# Altium PCB Sigmux.PcbDoc
Units mil, origin at the board's own origin, x right, y up, seen from the top; angles counter-clockwise.
Board outline 3520 x 2805 mil, 2 copper layers (Top Layer, Bottom Layer); 56 components, 60 nets, 241 pads, 69 vias.
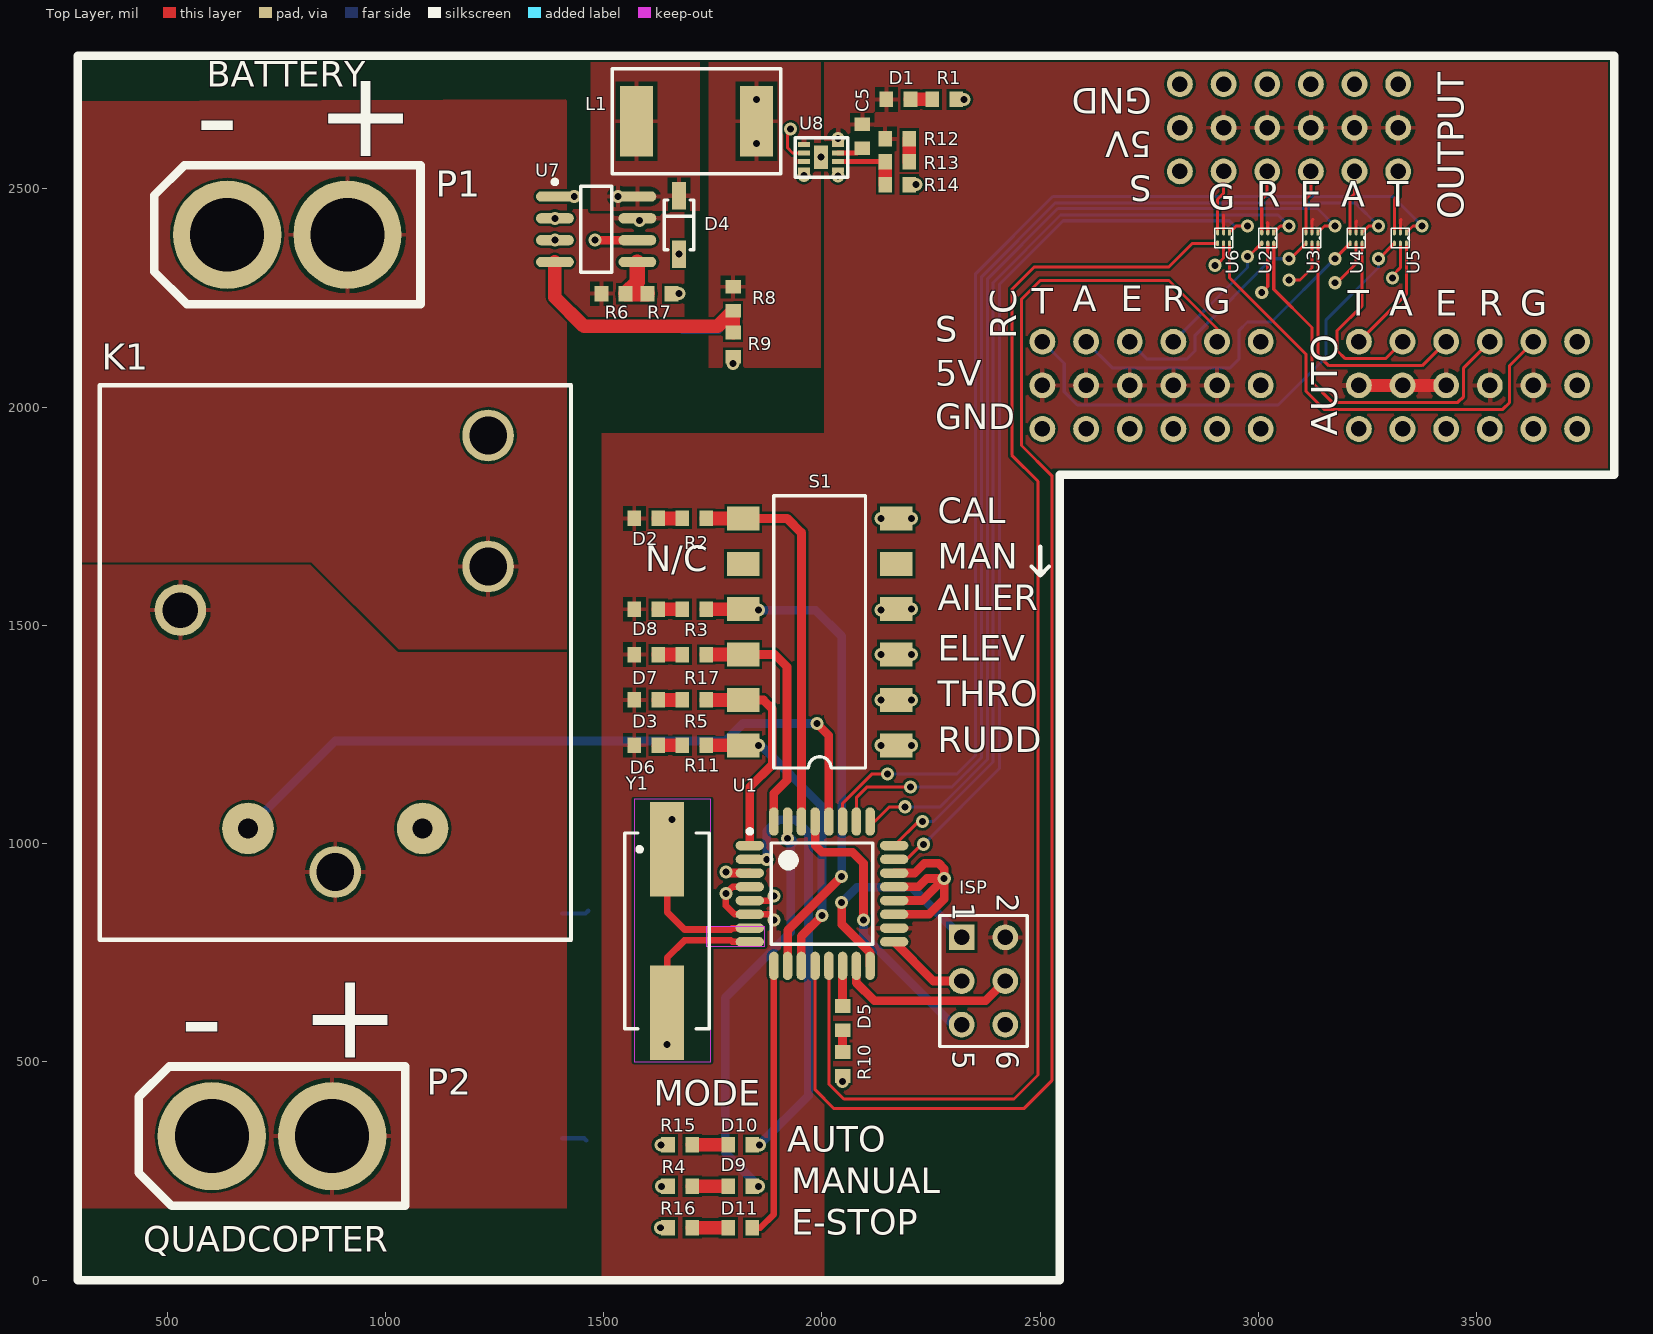
[diagram p0: Top Layer view]
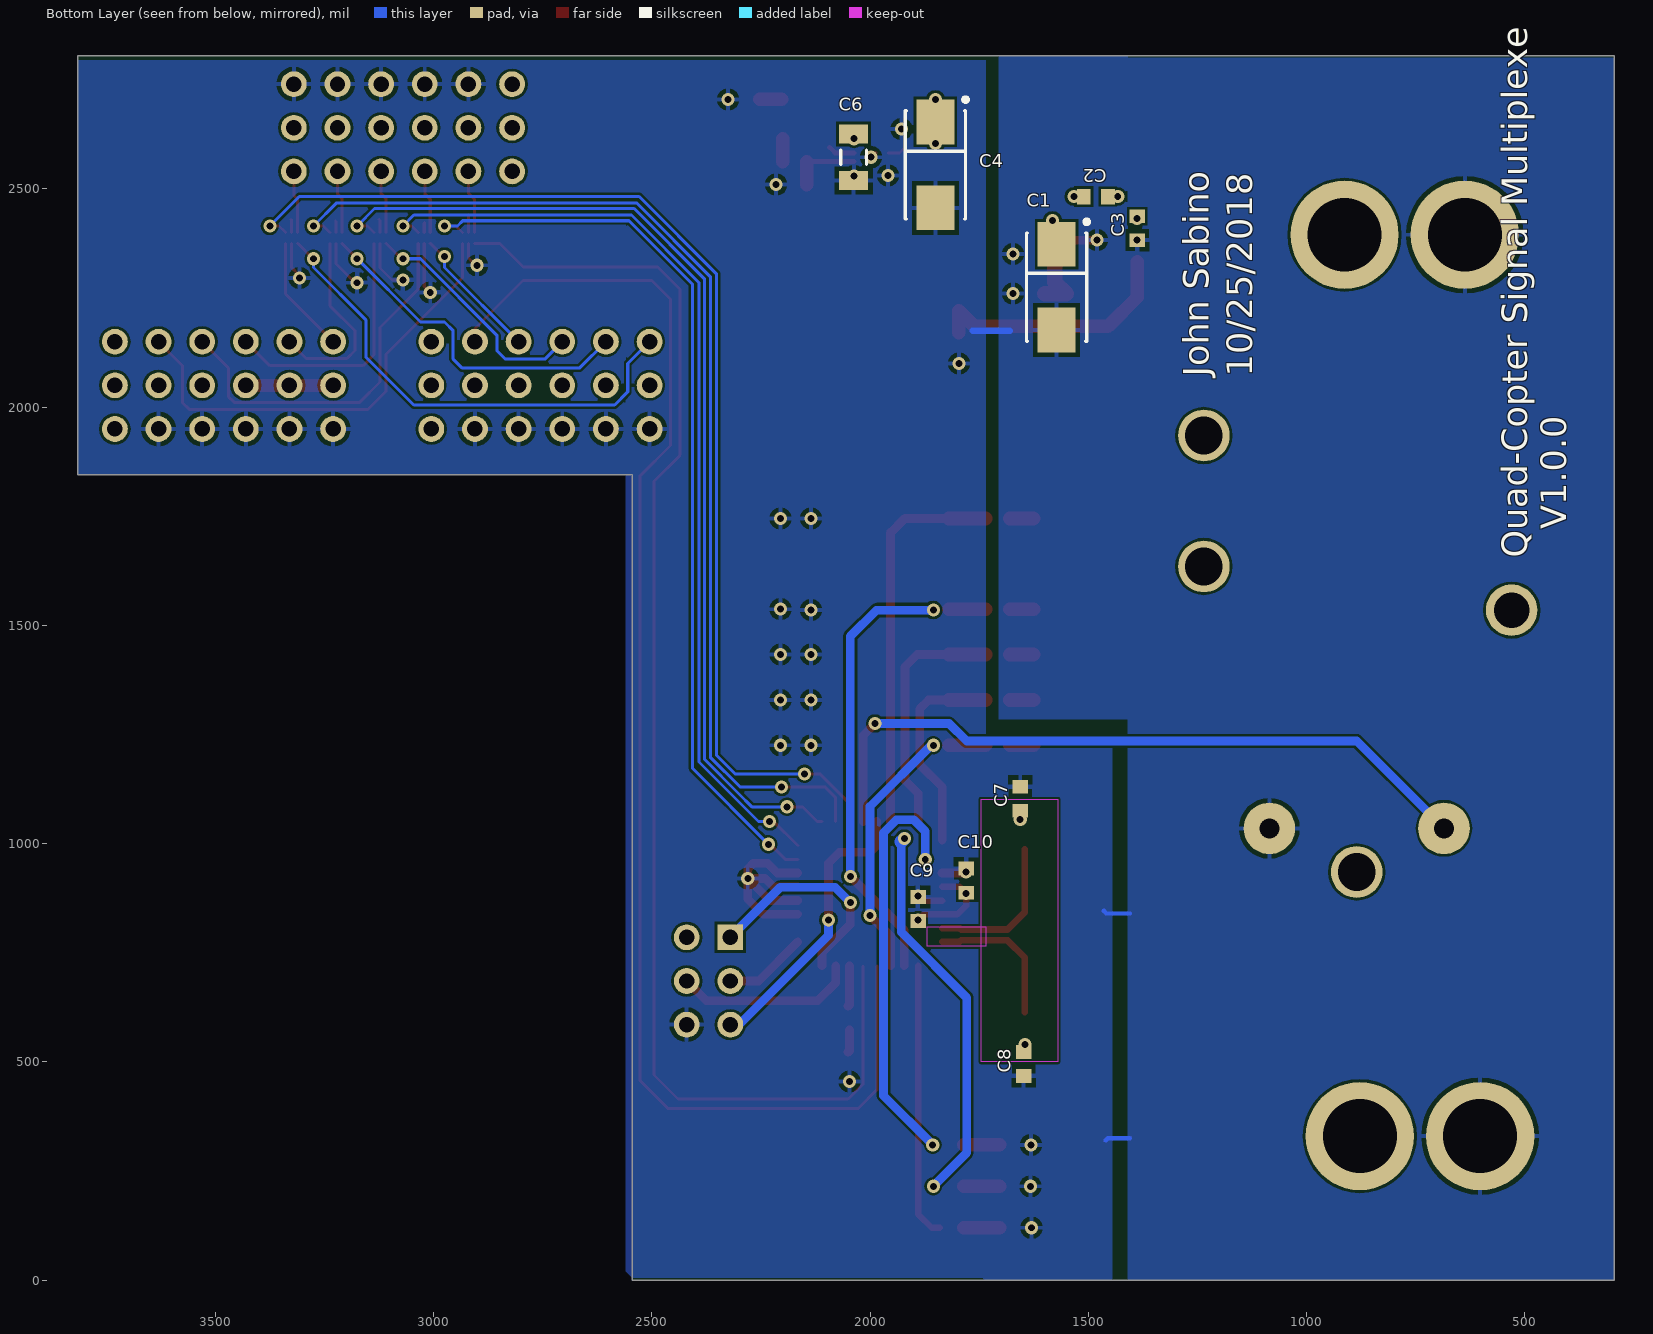
[diagram p1: Bottom Layer view, seen from below]

## Layer stack, top to bottom
Top Solder: solder mask 0.4, Solder Resist, Dk 3.5
Top Layer: signal copper 1.4
Dielectric 1: dielectric 12.6, FR-4, Dk 4.8
Bottom Layer: signal copper 1.4
Bottom Solder: solder mask 0.4, Solder Resist, Dk 3.5

## Board outline
295,0 295,2805 3815,2805 3815,1845 2545,1845 2545,0

## Design rules (kind name [scope] priority, off if disabled: settings)
Clearance Pour_clearance [InPolygon vs ISTrack OR ISVia OR IsPad OR OnLayer('Keep-Out Layer')] p1: gap=6 ignorepadtopadclearanceinfootprint=TRUE except(0: Arc-Hole Track-Hole SMDPad-Hole THPad-Hole Via-Hole Fill-Hole Poly-Hole Region-Hole Text-Hole)
Clearance [All] p2: gap=6 ignorepadtopadclearanceinfootprint=TRUE except(0: Arc-Hole Track-Hole SMDPad-Hole THPad-Hole Via-Hole Fill-Hole Poly-Hole Region-Hole Text-Hole)
DiffPairsRouting [All] p1: maxlimit=5000 minlimit=10 mostfreqgap=10 toplayer_minwidth=15 toplayer_maxwidth=300 toplayer_prefwidth=15 bottomlayer_minwidth=15 bottomlayer_maxwidth=300 bottomlayer_prefwidth=15 maxuncoupledlength=500
MinimumAnnularRing [All] p1: minimumring=6
MinimumSolderMaskSliver [All] p1: minsoldermaskwidth=3
PolygonConnect [All] p1: connectstyle=Relief reliefconductorwidth=10 reliefentries=4 polygonreliefangle="90 Angle" airgapwidth=10
RoomDefinition "Signal Multiplexers" [InComponentClass('Signal Multiplexers')] p1: confinementstyle=ConfineIn formatcopy=TRUE lockcomponents=FALSE outline 3780,1880 3780,2785 2340,2785 2340,1880
RoomDefinition "Power Supplies" [InComponentClass('Power Supplies')] p2: confinementstyle=ConfineIn formatcopy=TRUE lockcomponents=TRUE outline 1317.56,2055 2332.56,2055 2332.56,2800 1317.56,2800
RoomDefinition Microcontroller [InComponentClass('Microcontroller')] p3: confinementstyle=ConfineIn formatcopy=TRUE lockcomponents=FALSE outline 1400,170.32 2500,170.32 2500,1855 1400,1855
RoomDefinition "Emergency Stop System" [InComponentClass('Emergency Stop System')] p4: confinementstyle=ConfineIn formatcopy=TRUE lockcomponents=FALSE outline 270,505 1500,505 1500,1980 270,1980
RoomDefinition "Battery Interface" [InComponentClass('Battery Interface')] p5: confinementstyle=ConfineIn formatcopy=TRUE lockcomponents=FALSE outline 0,0 1460,0 1460,2985 0,2985
RoutingVias VddVias [(InNet('2V5') OR InNet('GND'))] p1 off: holewidth=12 width=24 viastyle="Through Hole" minholewidth=12 minwidth=24 maxholewidth=12 maxwidth=24
RoutingVias [All] p2: holewidth=15 width=30 viastyle="Through Hole" minholewidth=12 minwidth=24 maxholewidth=100 maxwidth=200
RoutingVias BigPowerVias [(InNet('3V8') OR InNet('GND'))] p3 off: holewidth=35 width=47 viastyle="Through Hole" minholewidth=12 minwidth=24 maxholewidth=35 maxwidth=47
SilkToSilkClearance [All] p1: silktosilkclearance=0
SilkToSolderMaskClearance SilkscreenOverComponentPads [All] p1: minsilkscreentomaskgap=0 clearancetoexposedcopper=FALSE
SolderMaskExpansion [All] p1: expansion=3
Width Width_50ohm [InNetClass('RF_Signal')] p1: maxlimit=38.73 minlimit=36.53 preferedwidth=37.62 impedancedriven=TRUE minimp=49.000000 maximp=51.000000 favimp=50.000000
Width Width_power [(InNet('2V5') OR InNet('GND') OR InNet('2V8') OR InNet('NetBUCK_1') OR InNet('NetBUCK_4') OR InNet('3V8') Or InNet('NetBAT_1'))] p2: maxlimit=80 minlimit=6 preferedwidth=20 minimp=50.000000 maximp=50.000000 favimp=50.000000
Width [All] p3: maxlimit=100 minlimit=6 preferedwidth=10 minimp=50.000000 maximp=50.000000 favimp=50.000000
26 further rules are at their usual default settings.

## Classes and differential pairs
net class POWER: LX
component class "Signal Multiplexers": AUTO OUTPUT RC U2 U3 U4 U5 U6
component class "Power Supplies": C1 C2 C3 C4 C5 C6 D1 D4 L1 R1 R6 R7 R8 R9 R12 R13 R14 U7 U8
component class Microcontroller: C7 C8 C9 C10 D2 D3 D5 D6 D7 D8 D9 D10 D11 ISP R2 R3 R4 R5 R10 R11 R15 R16 R17 S1 U1 Y1
component class "Emergency Stop System": K1
component class "Battery Interface": P1 P2
differential pair XTAL: +XTAL_P -XTAL_N

## Components (designator, comment, footprint, x,y, rotation, side; value= is the part's Value field where it differs from the comment)
AUTO "Header 18" PCBComponent_1 3230,2150 r0 top
C1 "T520C" C 1572.56,2275 r270 bottom value="100 uF"
C2 "Cap" 1608[0603] 1482.56,2482.56 r0 bottom value=0.1uF
C3 "Cap" 1608[0603] 1387.56,2410 r270 bottom value=0.1uF
C4 "T520C" C 1850.06,2555 r270 bottom value="100 uF"
C5 "" 1608[0603] 2092.56,2620.56 r90 top value=0.01uF
C6 "Bypass Capacitor" C1206 2037.56,2572.56 r90 bottom value=10uF
C7 "Filter" 1608[0603] 1655.73,1103.06 r270 bottom value=18pF
C8 "Filter" 1608[0603] 1648.02,495 r90 bottom value=18pF
C9 "Bypass Capacitor" 1608[0603] 1890,850.32 r90 bottom value=0.1uF
C10 "Bypass Capacitor" 1608[0603] 1780,915.32 r90 bottom value=0.1uF
D1 "Power LED (RED)" 1608[0603] 2175,2705 r0 top
D2 "Calibration Mode (GREEN)" 1608[0603] 1597.56,1745 r0 top
D3 "Manual Thottle Mode (YELLOW)" 1608[0603] 1597.56,1329.25 r0 top
D4 "D Schottky" SOD123 1672.56,2417.56 r90 top
D5 "uC Status LED (BLUE)" 1608[0603] 2047.24,600.32 r270 top
D6 "Manual Rudder Mode (WHITE)" 1608[0603] 1597.56,1225.32 r0 top
D7 "Manual Elevator Mode (BLUE)" 1608[0603] 1597.56,1433.19 r0 top
D8 "Manual Aileron Mode (RED)" 1608[0603] 1597.56,1537.13 r0 top
D9 "Calibration Mode (GREEN)" 1608[0603] 1812.56,215 r180 top
D10 "Manual Elevator Mode (BLUE)" 1608[0603] 1812.56,310 r180 top
D11 "Manual Aileron Mode (RED)" 1608[0603] 1812.56,120 r180 top
ISP "Header 3X2" HDR2X3 2320,785.32 r270 top
K1 "T90S1D12-5" T90S 882.5,1435 r0 top
L1 "UP1B-101-R" UP1B 1712.56,2655 r0 top value=100uH
OUTPUT "Header 18" PCBComponent_1 3320,2540 r180 top
P1 "To Battery" XT60 775,2395 r0 top
P2 "To Quad-Copter" XT60 740,330 r0 top
R1 "Current Limiting Resistor" 1608[0603] 2280,2705 r180 top value=330
R2 "Current Limiting Resistor" 1608[0603] 1707.56,1745 r180 top value=330
R3 "Current Limiting Resistor" 1608[0603] 1707.56,1537.13 r180 top value=330
R4 "Current Limiting Resistor" 1608[0603] 1675,215 r0 top value=330
R5 "Current Limiting Resistor" 1608[0603] 1707.56,1329.25 r180 top value=330
R6 "Res1" 1608[0603] 1522.56,2260 r180 top value=1M
R7 "Res1" 1608[0603] 1627.56,2260 r180 top value=255K
R8 "" 1608[0603] 1796.2,2248.19 r90 top value=34.8K
R9 "" 1608[0603] 1796.2,2143.19 r90 top value=10K
R10 "Current Limiting Resistor" 1608[0603] 2047.24,495.32 r90 top value=1.18K
R11 "Current Limiting Resistor" 1608[0603] 1707.56,1225.32 r180 top value=330
R12 "Res1" 1608[0603] 2172.56,2615 r180 top value=820K
R13 "Res1" 1608[0603] 2172.56,2562.72 r0 top value=60.4K
R14 "Res1" 1608[0603] 2172.56,2510 r180 top value=120K
R15 "Current Limiting Resistor" 1608[0603] 1675,310 r0 top value=1.18K
R16 "Current Limiting Resistor" 1608[0603] 1675,120 r0 top value=330
R17 "Current Limiting Resistor" 1608[0603] 1707.56,1433.19 r180 top value=1.18K
RC "Header 18" PCBComponent_1 2505,2150 r0 top
S1 "SW DIP-6" A6S-6104-H 2170,1225.32 r180 top
U1 "ATmega8L-8AI" 32A_N 2000,885.32 r0 top
U2 "RUDDER" uDFN-6L 3035.03,2400 r270 top
U3 "ELEVATOR" uDFN-6L 3136.28,2400 r270 top
U4 "AILERON" uDFN-6L 3237.53,2400 r270 top
U5 "THROTTLE" uDFN-6L 3338.78,2400 r270 top
U6 "GEAR" uDFN-6L 2933.78,2400 r270 top
U7 "Switching Regulator" SOIC8_N 1482.56,2407.56 r0 top
U8 "MAX8902BATA+T" "8 TDFN-EP" 1997.56,2572.56 r0 top
Y1 "XTAL 6.5536MHz" HC49/4H_SMX 1645,800 r270 top

## Footprints (in the part's own frame and the unit in brackets; to place one, negate y for a bottom-side part, rotate by r counter-clockwise, add the part's x,y. Pads: shape width x height; smd on the part's side, far side on the other; paste and mask are expansions set on the pad)
"8 TDFN-EP" [mm]
  rect 0.7x0.3 smd: 1(-0.99,0.75) 2(-0.99,0.25) 3(-0.99,-0.25) 4(-0.99,-0.75) 5(0.99,-0.75) 6(0.99,-0.25) 7(0.99,0.25) 8(0.99,0.75)
  rect 0.8x1.38 smd: 9(0,0)
  silkscreen extent -1.5,-1.15 1.55,1.13, body extent -1.08,-1.05 1.06,1.05, height 0.8
32A_N [mm] "Thin QFP, 32-Leads, Body 7x7mm, Pitch 0.8mm, IPC Medium Density"
  oval 1.65x0.55 smd: 1(-4.2,2.8) 2(-4.2,2) 3(-4.2,1.2) 4(-4.2,0.4) 5(-4.2,-0.4) 6(-4.2,-1.2) 7(-4.2,-2) 8(-4.2,-2.8) 17(4.2,-2.8) 18(4.2,-2) 19(4.2,-1.2) 20(4.2,-0.4) 21(4.2,0.4) 22(4.2,1.2) 23(4.2,2) 24(4.2,2.8)
  oval 0.55x1.65 smd: 9(-2.8,-4.2) 10(-2,-4.2) 11(-1.2,-4.2) 12(-0.4,-4.2) 13(0.4,-4.2) 14(1.2,-4.2) 15(2,-4.2) 16(2.8,-4.2) 25(2.8,4.2) 26(2,4.2) 27(1.2,4.2) 28(0.4,4.2) 29(-0.4,4.2) 30(-1.2,4.2) 31(-2,4.2) 32(-2.8,4.2)
  silkscreen extent -4.32,-2.95 2.95,3.75, body extent -3.5,-3.5 3.5,3.5, height 1.2
1608[0603] [mm] "Chip Capacitor, Body 1.6x0.8mm, IPC High Density"
  rect 0.8x0.9 smd: 1(-0.7,0) 2(0.7,0)
  body extent -0.87,-0.48 0.87,0.48, height 1.3
A6S-6104-H [mm]
  rect 1.9x1.4 smd: 1(0,0) 2(0,-2.64) 3(0,-5.28) 4(0,-7.92) 5(0,-10.56) 6(0,-13.2) 7(8.9,-13.2) 8(8.9,-10.56) 9(8.9,-7.92) 10(8.9,-5.28) 11(8.9,-2.64) 12(8.9,0)
  silkscreen extent 1.78,-14.52 7.12,1.32
C [mm] "Capacitor, SM Tantalum; Body 6.0 x 3.2 mm (LxW typ)"
  rect 2.6x2.2 smd: 1(-2.5,0) 2(2.5,0)
  silkscreen extent -3.92,-1.75 3.15,1.87
C1206 [mm] "Chip Capacitor, Body 3.2x1.6mm, IPC High Density"
  rect 1.1x1.7 smd: 1(-1.35,0) 2(1.35,0)
  silkscreen extent -0.4,-0.75 0.4,0.75, body extent -1.7,-0.9 1.7,0.9, height 1.3
HC49/4H_SMX [mm] "Surface Mount Quartz Crystal; Body 13.4 (inc. leads) x 4.9 mm (LxW max)"
  rect 5.5x2 smd: 1(-4.75,0) 2(4.75,0)
  silkscreen extent -5.7,-2.45 5.7,2.45
HDR2X3 [mm] "Connector; Header; 3x2 Position"
  rect 1.5x1.5 hole 0.9: 1(0,0)
  round 1.5 hole 0.9: 2(0,2.54) 3(2.54,0) 4(2.54,2.54) 5(5.08,0) 6(5.08,2.54)
  silkscreen extent -1.27,-1.27 6.35,3.81
PCBComponent_1 [mm]
  round 1.5 hole 0.9: 1(0,0) 2(2.54,0) 3(5.08,0) 4(7.62,0) 5(10.16,0) 6(12.7,0) 7(0,-2.54) 8(2.54,-2.54) 9(5.08,-2.54) 10(7.62,-2.54) 11(10.16,-2.54) 12(12.7,-2.54) 13(0,-5.08) 14(2.54,-5.08) 15(5.08,-5.08) 16(7.62,-5.08) 17(10.16,-5.08) 18(12.7,-5.08)
SOD123 [mm] "SOD-123; 2 Leads; Body 2.7 x 1.6 mm, (LxW)"
  rect 1.6x0.8 smd: 1(-1.7,0) 2(1.7,0)
  silkscreen extent -1.45,-0.85 1.45,0.85
SOIC8_N [mm] "SOIC, 8-Leads, Body 4.9x3.9mm, Pitch 1.27mm, IPC Medium Density"
  oval 2.2x0.6 smd: 1(-2.4,1.905) 2(-2.4,0.635) 3(-2.4,-0.635) 4(-2.4,-1.905) 5(2.4,-1.905) 6(2.4,-0.635) 7(2.4,0.635) 8(2.4,1.905)
  silkscreen extent -2.52,-2.5 0.9,2.88, body extent -2,-2.5 2,2.5, height 1.75
T90S [mm]
  round 3 hole 1.17: 1(-5.016,-10.16) 2(5.143,-10.16)
  round 3 hole 2.19: 3(8.954,5.08) 5(0.064,-12.7) 6(8.954,12.7)
  round 3 hole 2.06: 4(-8.954,2.54)
  silkscreen extent -13.65,-16.64 13.78,15.62
uDFN-6L [mm] "1 mm x 1 mm x 0.35 mm package"
  rect 0.33x0.18 smd: 1(0,0)
  oval 0.33x0.18 smd: 2(0,-0.35) 3(0,-0.7) 4(0.63,-0.7) 5(0.63,-0.35) 6(0.63,0)
  silkscreen extent -0.25,-0.87 0.88,0.17
UP1B [mm]
  rect 1.9x4.1 smd: 1(-3.492,0) 2(3.492,0)
  silkscreen extent -4.89,-3.05 4.89,3.05, body extent -4.44,-3.15 4.45,2.95, height 5.01
XT60 [mm] "LiPO Battery Connector"
  round 6.3 hole 4.3: 1(3.5,0) 2(-3.5,0)
  silkscreen extent -7.75,-4.05 7.75,4.05

## Part data
AUTO OUTPUT RC: "Header, 18-Pin", Manufacturer=Preci-Dip, Manufacturer Part Number=894-80-030-20-001101, Supplier Part Number 1=437-8948003020001101, ComponentLink1Description=https://datasheet.ciiva.com/18657/catalog-18657350.pdf, ComponentLink1URL=https://datasheet.ciiva.com/18657/catalog-18657350.pdf, Contact Plating=Tin, LatestRevisionDate=17-Jul-2002, LatestRevisionNote="Re-released for DXP Platform.", Mount="Through Hole", Number of Rows=3, Pitch=0.1inch, Publisher="Altium Limited", Row Spacing=0.1inch, Supplier 1=Mouser
C1 C4: library part T520D, "Tantalum Capacitors - Polymer SMD 6.3volts 100uF 20% ESR=5mOhms", Case Code - in=2312, Case Code - mm=6032, Manufacturer=KEMET, Manufacturer Part Number=T520C107M006ANE005, Mfr Case Code="C Case", Minimum Operating Temperature="- 55 C", Package / Case="2312 (6032 metric)", Supplier Part Number 1=80-T520C107M6ANE5, Tolerance="20 %", Voltage Rating="6.3 VDC", ComponentLink1Description=http://www.mouser.com/ds/2/212/KEM_T2076_T52X-530-1104134.pdf, ComponentLink1URL=http://www.mouser.com/ds/2/212/KEM_T2076_T52X-530-1104134.pdf, ESR="5 mOhms", Height="2.5 mm", Length="6 mm", Pricing="1=2.05, 10=1.63, 100=1.18, 500=0.800, 1000=0.699, 2500=0.650, 10000=0.625 (USD)", Series=T520, Supplier 1=Mouser, Width="3.2 mm"
C2 C3: "Multilayer Ceramic Capacitors MLCC - SMD/SMT 0603 .1uF 50volts X7R 10%", Case/Package=0603, Dielectric=X7R, Manufacturer="Vishay Semiconductors", Manufacturer Part Number=VJ0603Y104KXAAC, Max Operating Temperature=150°C, Min Operating Temperature=-55°C, Supplier Part Number 1=77-VJ0603Y104KXAAC, Tolerance=10%, Voltage Rating (DC)=50V, ComponentLink1Description=Datasheet, ComponentLink1URL=https://www.mouser.com/datasheet/2/427/vjcommercialseries-222796.pdf, Depth=0.8mm, Lead Free="Lead Free", Length=1.6mm, Supplier 1=Mouser
C5: library part Cap, "Multilayer Ceramic Capacitors MLCC - SMD/SMT 50volts 10000pF X7R 5%", Case Code (Imperial)=0603, Dielectric=X7R, Dielectric Material=Ceramic, Manufacturer=KEMET, Manufacturer Part Number=C0603C103J5RALTU, Max Operating Temperature=125°C, Min Operating Temperature=-55°C, Supplier Part Number 1=80-C0603C103J5RAL, Tolerance=5%, Voltage Rating=50V, ComponentLink1Description=Datasheet, ComponentLink1URL=http://www.kemet.com/docfinder?Partnumber=C0603C103J5RACTU, Depth=0.8mm, Dissipation Factor=2.5%, Height=0.8mm, Lead Pitch=0.7mm, Length=1.6mm, Supplier 1=Mouser, Thickness=0.034inch, Width=0.8mm
C6: library part Cap, "Multilayer Ceramic Capacitors MLCC - SMD/SMT SOFT 1206 25V 10uF X7R 20% T: 1.6mm", Case Code (Imperial)=1206, Dielectric=X7R, Manufacturer=TDK, Manufacturer Part Number=C3216X7R1E106M160AE, Max Operating Temperature=125°C, Min Operating Temperature=-55°C, Supplier Part Number 1=810-C3216X7R1E106MST, Tolerance=20%, Voltage Rating=25V, ComponentLink1Description=https://datasheet.ciiva.com/6285/mlcc-commercial-soft-en-6285640.pdf, ComponentLink1URL=https://datasheet.ciiva.com/6285/mlcc-commercial-soft-en-6285640.pdf, ComponentLink2Description=https://datasheet.ciiva.com/24218/c3216x7r1e106m160ae-265316-24218060.pdf, ComponentLink2URL=https://datasheet.ciiva.com/24218/c3216x7r1e106m160ae-265316-24218060.pdf, ComponentLink3Description=https://datasheet.ciiva.com/6285/mlcc-commercial-soft-en-6285643.pdf, ComponentLink3URL=https://datasheet.ciiva.com/6285/mlcc-commercial-soft-en-6285643.pdf, Composition=Ceramic, Depth=1.6mm, Height=1.8mm, Lead Free="Lead Free", Length=3.2mm, Supplier 1=Mouser, Thickness=0.071inch, Weight=0.000571oz, Width=0.063inch
C7 C8: library part Cap, "Capacitor", Case/Package=0603, Manufacturer=KEMET, Manufacturer Part Number=CBR06C180FAGAC, Max Operating Temperature=125°C, Min Operating Temperature=-55°C, Supplier Part Number 1=80-CBR06C180FAGAC, Tolerance=1%, Voltage Rating=250V, ComponentLink1Description=https://datasheet.ciiva.com/6258/kem-c1030-cbr-smd-6258345.pdf, ComponentLink1URL=https://datasheet.ciiva.com/6258/kem-c1030-cbr-smd-6258345.pdf, ComponentLink2Description=https://datasheet.ciiva.com/6258/kem-c1030-cbr-smd-6258342.pdf, ComponentLink2URL=https://datasheet.ciiva.com/6258/kem-c1030-cbr-smd-6258342.pdf, LatestRevisionDate=17-Jul-2002, LatestRevisionNote="Re-released for DXP Platform.", Length=0.063inch, PackageDescription="Radial Cap, Thru-Hole; 2 Leads; 0.3 in Pin Spacing", PackageReference=RAD-0.3, Published=8-Jun-2000, Publisher="Altium Limited", Supplier 1=Mouser, Thickness=0.034inch, Width=0.031inch
C9 C10: library part Cap, "Multilayer Ceramic Capacitors MLCC - SMD/SMT 0603 .1uF 50volts X7R 10%", Case/Package=0603, Dielectric=X7R, Manufacturer="Vishay Semiconductors", Manufacturer Part Number=VJ0603Y104KXAAC, Max Operating Temperature=150°C, Min Operating Temperature=-55°C, Supplier Part Number 1=77-VJ0603Y104KXAAC, Tolerance=10%, Voltage Rating (DC)=50V, ComponentLink1Description=Datasheet, ComponentLink1URL=https://www.mouser.com/datasheet/2/427/vjcommercialseries-222796.pdf, Depth=0.8mm, Lead Free="Lead Free", Length=1.6mm, Supplier 1=Mouser
D1 D8 D11: library part LED0, "Standard LEDs - SMD Super Red, 660nm 1.7V, 45mcd", Case Code (Imperial)=0603, Case Code (Metric)=1608, Colour=Red, Forward Current=20mA, Forward Voltage=1.7V, Lens Colour=White, Manufacturer=Lumex, Manufacturer Part Number=SML-LX0603SRW-TR, Max Operating Temperature=85°C, Min Operating Temperature=-25°C, Power Rating=50mW, Supplier Part Number 1=696-SML-LX0603SRW, ComponentLink1Description=https://datasheet.ciiva.com/2110/sml-lx0603srw-tr-2110094.pdf, ComponentLink1URL=https://datasheet.ciiva.com/2110/sml-lx0603srw-tr-2110094.pdf, ComponentLink2Description=https://datasheet.ciiva.com/7639/269316-7639176.pdf, ComponentLink2URL=https://datasheet.ciiva.com/7639/269316-7639176.pdf, ComponentLink3Description=https://datasheet.ciiva.com/16200/sml-lx0603srw-tr-16200056.pdf, ComponentLink3URL=https://datasheet.ciiva.com/16200/sml-lx0603srw-tr-16200056.pdf, ComponentLink4Description=https://datasheet.ciiva.com/2110/sml-lx0603srw-tr-2110093.pdf, ComponentLink4URL=https://datasheet.ciiva.com/2110/sml-lx0603srw-tr-2110093.pdf, ComponentLink5Description=https://datasheet.ciiva.com/7639/269316-7639175.pdf, ComponentLink5URL=https://datasheet.ciiva.com/7639/269316-7639175.pdf, ComponentLink6Description=https://datasheet.ciiva.com/2110/sml-lx0603srw-tr-2110095.pdf, ComponentLink6URL=https://datasheet.ciiva.com/2110/sml-lx0603srw-tr-2110095.pdf, ComponentLink7Description=https://datasheet.ciiva.com/30115/sml-lx0603srw-tr-30115864.pdf, ComponentLink7URL=https://datasheet.ciiva.com/30115/sml-lx0603srw-tr-30115864.pdf, ComponentLink8Description=https://datasheet.ciiva.com/15967/sml-lx0603srw-tr-15967174.pdf, ComponentLink8URL=https://datasheet.ciiva.com/15967/sml-lx0603srw-tr-15967174.pdf, ComponentLink9Description=https://datasheet.ciiva.com/4689/sml-lx0603srw-tr-113242-4689205.pdf, ComponentLink9URL=https://datasheet.ciiva.com/4689/sml-lx0603srw-tr-113242-4689205.pdf, Height=0.6mm, Illumination Colour=Red, Lead Free="Lead Free", Length=1.6mm, Lens Style=Diffused,Colorless,Rectangular, Lens Transparency=Diffused, Luminous Intensity=45mcd, Supplier 1=Mouser, Test Current=20mA, Viewing Angle=140°, Wavelength=660nm, Width=0.8mm
D2 D9: library part LED0, "Standard LEDs - SMD Ultra Green, 574nm 2.2V, 45mcd", Case/Package=0603, Colour=Green, Forward Current=20mA, Forward Voltage=2.2V, Lens Colour=White, Manufacturer=Lumex, Manufacturer Part Number=SML-LX0603SUGW-TR, Max Operating Temperature=85°C, Min Operating Temperature=-25°C, Supplier Part Number 1=696-SML-LX0603SUGW, ComponentLink1Description=https://datasheet.ciiva.com/7639/671274-7639178.pdf, ComponentLink1URL=https://datasheet.ciiva.com/7639/671274-7639178.pdf, ComponentLink2Description=https://datasheet.ciiva.com/2111/sml-lx0603sugw-tr-2111273.pdf, ComponentLink2URL=https://datasheet.ciiva.com/2111/sml-lx0603sugw-tr-2111273.pdf, ComponentLink3Description=https://datasheet.ciiva.com/7639/671274-7639177.pdf, ComponentLink3URL=https://datasheet.ciiva.com/7639/671274-7639177.pdf, ComponentLink4Description=https://datasheet.ciiva.com/46391/671274-46391015.pdf, ComponentLink4URL=https://datasheet.ciiva.com/46391/671274-46391015.pdf, ComponentLink5Description=https://datasheet.ciiva.com/2111/sml-lx0603sugw-tr-2111272.pdf, ComponentLink5URL=https://datasheet.ciiva.com/2111/sml-lx0603sugw-tr-2111272.pdf, ComponentLink6Description=https://datasheet.ciiva.com/2111/sml-lx0603sugw-tr-2111271.pdf, ComponentLink6URL=https://datasheet.ciiva.com/2111/sml-lx0603sugw-tr-2111271.pdf, ComponentLink7Description=https://datasheet.ciiva.com/4688/sml-lx0603sugw-tr-113249-4688850.pdf, ComponentLink7URL=https://datasheet.ciiva.com/4688/sml-lx0603sugw-tr-113249-4688850.pdf, ComponentLink8Description=https://datasheet.ciiva.com/16215/sml-lx0603sugw-tr-16215364.pdf, ComponentLink8URL=https://datasheet.ciiva.com/16215/sml-lx0603sugw-tr-16215364.pdf, ComponentLink9Description=https://datasheet.ciiva.com/30110/sml-lx0603sugw-tr-30110777.pdf, ComponentLink9URL=https://datasheet.ciiva.com/30110/sml-lx0603sugw-tr-30110777.pdf, Dominant Wavelength=574nm, Height=0.6mm, Lead Free="Lead Free", Length=1.6mm, Luminous Intensity=45mcd, Supplier 1=Mouser, Test Current=20mA, Viewing Angle=140°, Wavelength=574nm, Width=0.8mm
D3: library part LED0, "Standard LEDs - SMD Yellow 589nm 22mcd 5mA", Case/Package=0603, Colour=Yellow, Forward Current=30mA, Forward Voltage=2.3V, Lens Colour=Clear,Colorless, Manufacturer="Vishay Lite-On", Manufacturer Part Number=LTST-C193KSKT-5A, Max Operating Temperature=85°C, Min Operating Temperature=-55°C, Power Dissipation=75mW, Reverse Voltage=5V, Supplier Part Number 1=859-LTSTC193KSKT5A, Test Current=5mA, ComponentLink1Description=https://datasheet.ciiva.com/2110/s-110-ltst-c193kskt-5a-2110276.pdf, ComponentLink1URL=https://datasheet.ciiva.com/2110/s-110-ltst-c193kskt-5a-2110276.pdf, ComponentLink2Description=https://datasheet.ciiva.com/2110/s-110-ltst-c193kskt-5a-2110277.pdf, ComponentLink2URL=https://datasheet.ciiva.com/2110/s-110-ltst-c193kskt-5a-2110277.pdf, ComponentLink3Description=https://datasheet.ciiva.com/2110/s-110-ltst-c193kskt-5a-2110278.pdf, ComponentLink3URL=https://datasheet.ciiva.com/2110/s-110-ltst-c193kskt-5a-2110278.pdf, ComponentLink4Description=https://datasheet.ciiva.com/26890/getdatasheetpartid-683868-26890500.pdf, ComponentLink4URL=https://datasheet.ciiva.com/26890/getdatasheetpartid-683868-26890500.pdf, ComponentLink5Description=https://datasheet.ciiva.com/4688/lite-on-ltst-c193kskt-5a-187434-4688750.pdf, ComponentLink5URL=https://datasheet.ciiva.com/4688/lite-on-ltst-c193kskt-5a-187434-4688750.pdf, ComponentLink6Description=https://datasheet.ciiva.com/11775/0900766b80dc0553-11775611.pdf, ComponentLink6URL=https://datasheet.ciiva.com/11775/0900766b80dc0553-11775611.pdf, Depth=0.8mm, Dominant Wavelength=594.5nm, Height=0.35mm, Lead Free="Lead Free", Length=1.6mm, Lens Style=Diffused,Colorless,Rectangular, Lens Transparency=Clear, Luminous Intensity=45mcd, Supplier 1=Mouser, Viewing Angle=130°, Width=0.8mm
D4: "Schottky Diodes & Rectifiers Schottky Power Rect .5a", If - Forward Current="0.5 A", Ifsm - Forward Surge Current="5.5 A", Ir - Reverse Current="250 uA", Manufacturer="ON Semiconductor / Fairchild", Manufacturer Part Number=MBR0520L, Operating Temperature Range="- 65 C to + 125 C", Package / Case=SOD-123, Supplier Part Number 1=512-MBR0520L, Vf - Forward Voltage="0.385 V", Vrrm - Repetitive Reverse Voltage="20 V", Code_JEDEC=DO-214-AA, Datasheet=http://www.mouser.com/ds/2/308/MBR0520L-1124987.pdf, Height="1.17 mm (Max)", LatestRevisionDate=17-Jul-2002, LatestRevisionNote="Re-released for DXP Platform.", Length="2.85 mm (Max)", Supplier 1=Mouser, Supplier 2=Digi-Key, Supplier Part Number 2=MBR0520LCT-ND, Technology=Si, Type="Schottky Diode", Width="1.8 mm (Max)"
D5 D7 D10: library part LED0, "Standard LEDs - SMD 0603 Dome Lens LED Blue- 470nm", If - Forward Current=2mA, Manufacturer=Kingbright, Manufacturer Part Number=APHD1608LVBC/D, Maximum Operating Temperature=+85C, Minimum Operating Temperature=-40C, Supplier Part Number 1=604-APHD1608LVBCD, Vf - Forward Voltage=2.65V, ComponentLink1Description=Datasheet, ComponentLink1URL=https://www.mouser.com/datasheet/2/216/APHD1608LVBC-D-1100823.pdf, Luminous Intensity="45 mcd", Supplier 1=Mouser
D6: library part LED0, "Standard LEDs - SMD CHIPLED, WHITE", Colour=White, Forward Current=15mA, Forward Voltage=3.2V, Manufacturer="Osram Opto", Manufacturer Part Number=Q65110-A7209, Max Operating Temperature=85°C, Min Operating Temperature=-40°C, Reverse Voltage=5V, Supplier Part Number 1=720-LWQ38GQ1S13K6L1, Test Current=5mA, ComponentLink1Description=https://datasheet.ciiva.com/26937/getdatasheetpartid-780965-26937253.pdf, ComponentLink1URL=https://datasheet.ciiva.com/26937/getdatasheetpartid-780965-26937253.pdf, Depth=0.9mm, Length=1.7mm, Lens Style=Diffused,Colored,Rectangular, Luminous Flux=0.6lm, Luminous Intensity=224mcd, Supplier 1=Mouser
ISP: "Header, 3-Pin, Dual row", LatestRevisionDate=17-Jul-2002, LatestRevisionNote="Re-released for DXP Platform.", Publisher="Altium Limited"
K1: "General Purpose Relays SPST-NO PCB 5 VDC", Coil Current=185mA, Coil Power=1W, Coil Resistance=27R, Coil Voltage (DC)=5V, Contact Current Rating=30A, Contact Voltage Rating (AC)=277V, Manufacturer="TE Connectivity", Max Operating Temperature=85°C, Min Operating Temperature=-55°C, Power Consumption=2.8W, Supplier Part Number 1=655-T90S1D12-5, Voltage Rating (AC)=240V, Coil Type=Non-Latching, ComponentLink1Description=https://datasheet.ciiva.com/2406/eng-ds-1308242-t90-0214-t90-2406880.pdf, ComponentLink1URL=https://datasheet.ciiva.com/2406/eng-ds-1308242-t90-0214-t90-2406880.pdf, ComponentLink2Description=https://datasheet.ciiva.com/30468/0900766b8107bb2d-30468875.pdf, ComponentLink2URL=https://datasheet.ciiva.com/30468/0900766b8107bb2d-30468875.pdf, ComponentLink3Description=https://datasheet.ciiva.com/7999/1470339-7999710.pdf, ComponentLink3URL=https://datasheet.ciiva.com/7999/1470339-7999710.pdf, Contact Material=Silver,Cadmium, Current Rating=30A, Depth=25.9mm, Height=20.4mm, Length=32.3mm, Manufacturer Part Number=T90S1D12-5, Max Voltage Rating (AC)=277V, Mount="Through Hole,PCB", Number of Pins=5, Operate Time=15ms, Release Time=15ms, Supplier 1=Mouser, Throw Configuration=SPST, Voltage Rating (DC)=5V, Weight=0.918oz, Width=27.4mm
L1: library part UP1B-100-R, "Fixed Inductors 100uH 0.53A 1.11ohms", Current Rating=470mA, DC Resistance (DCR)=1.11R, Manufacturer=Eaton, Max Operating Temperature=85°C, Min Operating Temperature=-40°C, Saturation Current=530mA, Supplier Part Number 1=704-UP1B-101-R, Test Frequency=100kHz, Tolerance=20%, ComponentLink1Description=Datasheet, ComponentLink1URL=https://www.mouser.com/datasheet/2/87/BUS_Elx_PM_4308_UNI_PAC_Power_Inductors-268242.pdf, Core Material=Ferrite, DC Current=470mA, Depth=6.1mm, Height - Seated (Max)=0.197inch, Manufacturer Part Number=UP1B-101-R, Shielding=Unshielded, Supplier 1=Mouser, Width=0.24inch
P1 P2: library part "Header 2", "XT60", Manufacturer=SparkFun, Manufacturer Part Number=PRT-10474, Supplier Part Number 1=474-PRT-10474, Supplier 1=Mouser
R1 R2 R3 R4 R5 R11 R16: library part Res1, "Thick Film Resistors - SMD 330 ohm 0.5% 0.33W AEC-Q200", Manufacturer="KOA Speer", Manufacturer Part Number=SG73G1JTTD3300D, Power Rating=330mW, Supplier Part Number 1=660-SG73G1JTTD3300D, Tolerance=0.5%, ComponentLink1Description=Datasheet, ComponentLink1URL=https://www.mouser.com/datasheet/2/219/SG73G-1316861.pdf, Supplier 1=Mouser
R6: "Thin Film Resistors - SMD 1M OHM .1% 25PPM", Case/Package=0603, Manufacturer=Yageo, Manufacturer Part Number=RT0603BRD071ML, Max Operating Temperature=155°C, Max Power Dissipation=100mW, Min Operating Temperature=-55°C, Supplier Part Number 1=603-RT0603BRD071ML, Temperature Coefficient=25ppm/°C, Tolerance=0.1%, ComponentLink1Description=Datasheet, ComponentLink1URL=https://www.mouser.com/datasheet/2/447/PYu-RT_1-to-0.01_RoHS_L_9-1222720.pdf, Composition="Thin Film", Height=0.022inch, Length=0.063inch, Supplier 1=Mouser, Width=0.031inch
R7: "Thin Film Resistors - SMD 255Kohms .1% 25ppm", Case Code (Imperial)=0603, Manufacturer="Vishay Dale", Manufacturer Part Number=TNPW0603255KBEEN, Max Operating Temperature=125°C, Min Operating Temperature=-55°C, Power Rating=100mW, Supplier Part Number 1=71-TNPW0603255KBEEN, Temperature Coefficient=25ppm/°C, Tolerance=0.1%, Voltage Rating=75V, ComponentLink1Description=Datasheet, ComponentLink1URL=https://datasheet.ciiva.com/2614/tnpw-e3-2614598.pdf, Composition="Thin Film", Contact Plating=Tin, Height=0.022inch, Length=0.063inch, Radiation Hardening=No, Supplier 1=Mouser, Weight=7.1E-05oz, Width=0.8mm
R8: library part Res1, "Thin Film Resistors - SMD 150mW 34.8kohm 0.1% 25PPM 0603", Manufacturer=Vishay, Manufacturer Part Number=PAT0603E3482BST1, Operating Temperature Range="- 55 C to + 125 C", Package / Case="0603 (1608 metric)", Power Rating="150 mW", Supplier Part Number 1=71-PAT0603E3482BST1, Temperature Coefficient="25 PPM / C", Tolerance="0.1 %", Voltage Rating="75 V", ComponentLink1Description=Datasheet, ComponentLink1URL=http://www.mouser.com/ds/2/427/pat-247403.pdf, Supplier 1=Mouser, Width="0.762 mm"
R9: library part Res1, "Thin Film Resistors - SMD 150mW 10kohm 0.1% 25PPM 0603", Manufacturer=Vishay, Manufacturer Part Number=PAT0603E1002BST1, Operating Temperature Range="- 55 C to + 125 C", Package / Case="0603 (1608 metric)", Power Rating="150 mW", Supplier Part Number 1=71-PAT0603E1002BST1, Temperature Coefficient="25 PPM / C", Tolerance="0.1 %", Voltage Rating="75 V", ComponentLink1Description=Datasheet, ComponentLink1URL=http://www.mouser.com/ds/2/427/pat-247403.pdf, Datasheet=http://www.mouser.com/ds/2/427/pat-247403.pdf, Height="0.254 mm", Length="1.524 mm", Supplier 1=Mouser, Supplier 2=Digi-Key, Supplier Part Number 2=PAT10KACT-ND, Width="0.762 mm"
R10 R15 R17: library part Res1, "Thin Film Resistors - SMD 1/16W 1.18Kohm 0.5% 25ppm", Case/Package=0603, Manufacturer=Susumu, Manufacturer Part Number=RR0816P-1181-D-08H, Max Operating Temperature=125°C, Max Power Dissipation=63mW, Min Operating Temperature=-55°C, Power Rating=62.5mW, Supplier Part Number 1=754-RR0816P-1181D08H, Temperature Coefficient=25ppm/°C, Tolerance=0.5%, Voltage Rating=75V, ComponentLink1Description=Datasheet, ComponentLink1URL=https://www.mouser.com/datasheet/2/219/SG73G-1316861.pdf, ComponentLink2Description=https://datasheet.ciiva.com/2518/rr-data-sheet-2518672.pdf, ComponentLink2URL=https://datasheet.ciiva.com/2518/rr-data-sheet-2518672.pdf, ComponentLink3Description=https://datasheet.ciiva.com/2518/rr-data-sheet-2518670.pdf, ComponentLink3URL=https://datasheet.ciiva.com/2518/rr-data-sheet-2518670.pdf, ComponentLink4Description=https://datasheet.ciiva.com/2518/rr-data-sheet-2518671.pdf, ComponentLink4URL=https://datasheet.ciiva.com/2518/rr-data-sheet-2518671.pdf, Composition="Thin Film", Height=0.02inch, Lead Free="Lead Free", Length=0.063inch, Supplier 1=Mouser, Weight=7.1E-05oz, Width=0.031inch
R12: "Thin Film Resistors - SMD CPF0603 820K 0.1% 25PPM 5K RL", Case/Package=0603, Manufacturer="TE Connectivity", Manufacturer Part Number=CPF0603B820KE, Max Operating Temperature=125°C, Min Operating Temperature=-55°C, Power Rating=63mW, Supplier Part Number 1=279-CPF0603B820KE, Temperature Coefficient=25ppm/°C, Tolerance=0.1%, ComponentLink1Description=https://datasheet.ciiva.com/11819/0900766b80d2f5da-11819682.pdf, ComponentLink1URL=https://datasheet.ciiva.com/11819/0900766b80d2f5da-11819682.pdf, Depth=0.8mm, Height=0.45mm, Length=1.6mm, Supplier 1=Mouser
R13: "Thin Film Resistors - SMD .063W 60.4K ohm 0.1% 25ppm", Manufacturer="TT Welwyn", Manufacturer Part Number=PCF0603R-60K4BT1, Max Operating Temperature=125°C, Min Operating Temperature=-55°C, Power Rating=63mW, Supplier Part Number 1=756-PCF0603R-60K4BT1, Temperature Coefficient=25ppm/°C, Tolerance=0.1%, Voltage Rating=50V, ComponentLink1Description=https://datasheet.ciiva.com/48780/1315872-48780789.pdf, ComponentLink1URL=https://datasheet.ciiva.com/48780/1315872-48780789.pdf, ComponentLink2Description=https://datasheet.ciiva.com/48780/1315872-48780790.pdf, ComponentLink2URL=https://datasheet.ciiva.com/48780/1315872-48780790.pdf, ComponentLink3Description=https://datasheet.ciiva.com/12834/pcf-437472-12834504.pdf, ComponentLink3URL=https://datasheet.ciiva.com/12834/pcf-437472-12834504.pdf, Composition="Metal Film,Thin Film", Supplier 1=Mouser, Width=0.8mm
R14: "Thin Film Resistors - SMD CPF 0603 120K 0.1% 25PPM 1K RL", Case/Package=0603, Manufacturer="TE Connectivity", Manufacturer Part Number=CPF0603B120KE1, Max Operating Temperature=155°C, Min Operating Temperature=-55°C, Power Rating=63mW, Supplier Part Number 1=279-CPF0603B120KE1, Temperature Coefficient=25ppm/°C, Tolerance=0.1%, Voltage Rating=50V, ComponentLink1Description=https://datasheet.ciiva.com/22670/1723857-22670584.pdf, ComponentLink1URL=https://datasheet.ciiva.com/22670/1723857-22670584.pdf, ComponentLink2Description=https://datasheet.ciiva.com/12793/eng-ds-1773200-i-12793932.pdf, ComponentLink2URL=https://datasheet.ciiva.com/12793/eng-ds-1773200-i-12793932.pdf, Composition="Thin Film", Height=0.45mm, Length=1.55mm, Supplier 1=Mouser, Weight=7.1E-05oz, Width=0.8mm
S1: "DIP Switches / SIP Switches 6 Pole Raised Act. Dip SW", Current Rating=25mA, Manufacturer=Omron, Manufacturer Part Number=A6S-6104-PH, Max Operating Temperature=70°C, Max Voltage Rating (DC)=24V, Min Operating Temperature=-20°C, Supplier Part Number 1=653-A6S-6104-PH, ComponentLink1Description=https://datasheet.ciiva.com/48485/en-a6s-48485127.pdf, ComponentLink1URL=https://datasheet.ciiva.com/48485/en-a6s-48485127.pdf, ComponentLink2Description=https://datasheet.ciiva.com/5258/a6s-h-1110-11975-5258393.pdf, ComponentLink2URL=https://datasheet.ciiva.com/5258/a6s-h-1110-11975-5258393.pdf, Contact Plating=Gold, Electrical Life=1000Cycles, Length=0.637inch, PackageDescription="DIP Switch; 12 Leads", PackageReference=DIP-12/SW, Pitch=0.1inch, Supplier 1=Mouser, Termination="Gull Wing", Throw Configuration=SPST, Voltage Rating (DC)=24V
U1: "8-Bit AVR Microcontroller with 8K Bytes of In-System Programmable Flash Memory", Supplier Part Number 1=ATMEGA8L-8AI-ND, Code_JEDEC=MS-026-ABA, ComponentLink1Description=Datasheet, ComponentLink1URL=http://www.atmel.com/dyn/resources/prod_documents/doc2486.pdf, DatasheetVersion=2486H-AVR-09/02, LatestRevisionDate=16-Oct-2006, LatestRevisionNote="IPC-7351 Footprint Added.", PackageDescription="32-Lead, 7x7x1.0 mm Body, 0.8mm Lead Pitch, Thin Profile Plastic Quad Flat Package (TQFP)", PackageReference=32A, PackageVersion="revB, Oct-2001", Published=17-Sep-2003, Publisher="Altium Limited", Supplier 1=Digi-Key, Supplier 2=Farnell, Supplier 3=Mouser, Supplier Part Number 2=3917952, Supplier Part Number 3=556-ATMEGA8L-8AI
U2 U3 U4 U5 U6: library part DG4157EDN, "Multiplexer Switch ICs SPDT 2:1 Mutiplxr 1.65-5.5V; 0.7ohm", Supplier Part Number 1=78-DG4157EDN-T1-GE4, ComponentLink1Description=Datasheet, ComponentLink1URL=https://www.mouser.com/datasheet/2/427/dg4157e-1291751.pdf, ComponentLink2Description=Foorptint, ComponentLink2URL=http://www.vishay.com/docs/76086/udfn-6l.pdf, Supplier 1=Mouser, Supplier 2=Digi-Key, Supplier Part Number 2=DG4157EDN-T1-GE4TR-ND
U7: library part MAX5035, "Switching Voltage Regulators 1A 76V MAXPower Step-Down", Manufacturer=Maxim, Manufacturer Part Number=MAX5035DASA+T, Max Input Voltage=76V, Max Operating Temperature=125°C, Max Output Current=1A, Max Output Voltage=13.2V, Min Input Voltage=7.5V, Min Operating Temperature=-40°C, Min Output Voltage=1.25V, Supplier Part Number 1=700-MAX5035DASA-T-NR, Switching Frequency=125kHz, ComponentLink1Description=Datasheet, ComponentLink1URL=https://datasheets.maximintegrated.com/en/ds/MAX5035.pdf, Output Configuration=Positive, Output Type=Adjustable, Output Voltage=13.2V, Supplier 1=Mouser
U8: "LDO Voltage Regulators 500mA LDO Regulator", Input Voltage Range="1.7V to 5.5V", Manufacturer="Maxim Integrated", Manufacturer Part Number=MAX8902AATA+T, Max Operating Temperature=125°C, Max Output Current=500mA, Max Output Voltage=5.3V, Max Power Dissipation=953.5mW, Min Current Limit=600mA, Min Operating Temperature=-40°C, Min Output Voltage=600mV, Output Voltage Range="0.6V to 5.3V", Output Voltage Selection="Pin selection", Power Supply Rejection Ratio (PSRR)=85dB, Supplier Part Number 1=700-MAX8902BATAT, Accuracy="+/- 1.5% (over load, line, and temperature)", ComponentLink1Description=Datasheet, ComponentLink1URL=https://datasheets.maximintegrated.com/en/ds/MAX8902-MAX8902B.pdf, Datasheet=https://datasheets.maximintegrated.com/en/ds/MAX8902-MAX8902B.pdf, Output Noise="16uV (RMS) from 10Hz to 100KHz", Output Type=Adjustable, Polarity=Positive, Power Rating=953.5mW, PSRR at 5KHz=92dB, Supplier 1=Mouser
Y1: library part XTAL, "Crystals 6.5536MHz SERIES", Frequency=6.5536MHz, Frequency Stability=50ppm, Load Capacitance=Series, Manufacturer="ECS International", Manufacturer Part Number=ECS-65.5-S-5PX-TR, Max Operating Temperature=70°C, Min Operating Temperature=-10°C, Shunt Capacitance=7pF, Supplier Part Number 1=520-CSM655-S-X, Tolerance=30ppm, ComponentLink1Description=Datasheet, ComponentLink1URL=https://www.mouser.com/datasheet/2/122/csm-7x-1299.pdf, Drive Level=500uW, Height=4.3mm, Length=13.2mm, Maximum ESR=70, Supplier 1=Mouser, Width=4.8mm

## Via types
v1: diameter 30, hole 16, Top Layer to Bottom Layer, 69 vias

## Nets (pads, with @x,y where several pads share a name; then routed paths per layer and width w, separated by ;. In a path a pad name is that pad's centre, name@x,y a point inside that pad or via, vN(x,y) a via of type N, cw(c..) or ccw(c..) an arc to the next point about the centre after c; other vN are vias at no path point)
5V: AUTO.7 AUTO.8 AUTO.9 AUTO.10 AUTO.11 C5.2 C6.2 C9.1 C10.1 D1.1 D2.1 D3.1 D6.1 D7.1 D8.1 ISP.2 OUTPUT.7 OUTPUT.8 OUTPUT.9 OUTPUT.10 OUTPUT.11 R12.2 RC.7 RC.8 RC.9 RC.10 RC.11 U1.4 U1.6 U1.18 U2.2 U3.2 U4.2 U5.2 U6.2 U8.8 | length 564.6
  Top Layer w7: U6.2 2920,2440 ; 3020.47,2423.19 3020.47,2422.72 3021.25,2421.94 U2.2 ; U3.2 3122.5,2427.64 3125,2430.14 ; U4.2 3223.75,2424.93 3225,2426.18 ; U5.2 3325,2428.15 3326.85,2430
  Top Layer w15: U1.4 1795.13,901.06 v1(1780,885.93) 1780,857.69 1799.62,838.07 U1.6 1876.69,838.07 v1(1889.76,825)
  Top Layer w30: AUTO.7 AUTO.8 AUTO.9
  other v1: 2036.54,2615
5V5: C4.1 L1.2 R8.2 U8.1 U8.3
  other v1: 1850.06,2604.17 1850.06,2705
AUTO_AILERON_SIGNAL: AUTO.2 U4.6 | length 443.1
  Top Layer w7: U4.6 3237.53,2232.53 3180,2175 3180,2130 3199.03,2110.97 3290.97,2110.97 AUTO.2
AUTO_ELEVATOR_SIGNAL: AUTO.3 U3.6 | length 582.1
  Top Layer w7: U3.6 3136.28,2120 3161.28,2095 3375,2095 AUTO.3
AUTO_GEAR_SIGNAL: AUTO.5 U6.6 | length 1063.5
  Top Layer w7: U6.6 2933.78,2296.22 3108.72,2121.28 3108.72,2036.28 3150,1995 3559.57,1995 3575,2010.43 3575,2095 AUTO.5
AUTO_RUDDER_SIGNAL: AUTO.4 U2.6 | length 876.9
  Top Layer w7: U2.6 3035.03,2269.97 3122.5,2182.5 3122.5,2057.5 3169.03,2010.97 3456.81,2010.97 3470,2024.17 3470,2090 AUTO.4
AUTO_THROTTLE_SIGNAL: AUTO.1 U5.6 | length 270.3
  Top Layer w7: AUTO.1 3338.78,2258.78 U5.6
Autonomous_Mode_LED: D10.1 U1.2 | length 945.3
  Bottom Layer w20: v1(1856.3,310) 1969,422.7 1969,1025.26 1939.26,1055 1899.76,1055 1873.46,1028.69 v1(1873.46,964.06)
BAT+: C1.1 K1.3 P1.1 R6.2 U7.7
  other v1: 1582.05,2427.56
BAT+_OUT: K1.4 K1.5 P2.1
Calibration_Pin: R2.1 S1.7 U1.30 | length 892.8
  Top Layer w21: S1.7 1920,1745 1952.76,1712.24 U1.30
  Top Layer w31.5: R2.1 S1.7
Emergency_Stop_Mode_LED: D11.1 U1.9 | length 631.3
  Top Layer w15: D11.1 1858.6,120 1889.76,151.17 U1.9
GND: AUTO.13 AUTO.14 AUTO.15 AUTO.16 AUTO.17 C1.2 C3.2 C4.2 C6.1 C7.1 C8.1 C9.2 C10.2 D4.1 ISP.6 K1.2 OUTPUT.13 OUTPUT.14 OUTPUT.15 OUTPUT.16 OUTPUT.17 P1.2 P2.2 R1.1 R4.1 R7.1 R9.1 R10.1 R14.1 R15.1 R16.1 RC.13 RC.14 RC.15 RC.16 RC.17 S1.1 S1.2 S1.3 S1.4 S1.6 U1.3 U1.5 U1.19 U1.20 U1.21 U1.22 U2.5 U3.5 U4.5 U5.5 U6.5 U7.3 U7.6 U8.2 U8.4 U8.5 U8.9 | length 1559
  Top Layer w7: v1@1921.26,2630 1921.26,2593.74 1932.6,2582.4 U8.2 ; v1@2910,2331.81 2920,2341.81 U6.5 ; v1(3007.47,2262.79) 3021.25,2276.57 U2.5 ; v1@3079.04,2291.25 3094.97,2291.25 3122.5,2318.78 U3.5 ; v1@3177.39,2282.61 3223.75,2328.97 U4.5 ; v1@3310.42,2305 3325,2319.58 U5.5
  Top Layer w10: U8.9@1987.72,2582.4 v1(1997.56,2572.56)
  Top Layer w15: v1(1780,935) v1@1782.44,932.56 ; U1.5 1879.33,869.57 v1(1889.76,880)
  Top Layer w20: v1(1480,2382.56) U7.6 ; U1.19 2245.02,838.07 2280,873.06 v1(2280,920) ; U1.20 2229.57,869.57 v1(2280,920) ; U1.21 2221.2,901.06 2240.14,920 v1(2280,920) ; U1.22 2212.42,932.56 2234.64,954.78 2267.14,954.78 2280,941.92 v1(2280,920)
  Top Layer w21: v1@1782.44,932.56 U1.3
  Bottom Layer w10: 1405,325 1455,325 1460,320 ; 1405,840 1458.34,840 1464.75,846.41
  Bottom Layer w15: 1680,2175 1765,2175
  other v1: 1630,120 1632.28,215 1631.24,310 2047.24,455 2135,1225.32 2205,1225.32 2135,1329.25 2205,1329.25 2135,1433.19 2205,1433.19 2135,1535 2205,1537.13 2135,1745 2205,1745 1796.2,2100 1672.56,2260 3175,2285 3070,2291.25 3306.71,2296.05 2900,2325 1672.56,2350.63 1388.07,2382.56 2215,2509.71 2036.54,2530 1958.58,2531.13 1928.11,2636.85 2325,2704.99
LIN_BYP: C5.1 U8.7 | length 61.2
  Top Layer w11: U8.7 2079.96,2582.4 C5.1@2092.56,2595
LIN_FB: R13.1 R14.2 U8.6 | length 161.2
  Top Layer w11: U8.6 R13.1
  Top Layer w31: R14.2 R13.1
LX: C2.2 D4.2 L1.1 U7.8
  other v1: 1532.71,2482.56
Manual_Aileron_Pin: R3.1 S1.9 U1.10 | length 1105.6
  Top Layer w20: U1.10 1921.26,801.26 v1(2045,925)
  Top Layer w31.5: R3.1 S1.9
  Bottom Layer w20: v1(1855,1535) 1985,1535 2045,1475 v1(2045,925)
Manual_Elevator_Pin: R17.1 S1.10 U1.32 | length 563.4
  Top Layer w20: S1.10 1891.81,1433.19 1920,1405 1920,1145.24 1889.76,1115 U1.32
  Top Layer w31.5: R17.1 S1.10
Manual_Mode_LED: D9.1 U1.31 | length 894.1
  Bottom Layer w20: v1(1855,215) 1778.18,291.82 1778.18,647.17 1928.72,797.7 v1@1928.72,1004.4
  Bottom Layer w30: v1(1921.26,1011.86) v1@1928.72,1004.4
Manual_Rudder_Pin: R11.1 S1.12 U1.11 | length 672.2
  Top Layer w20: U1.11 1952.76,787.76 v1(2000,835)
  Top Layer w31.5: R11.1 S1.12
  Bottom Layer w20: v1(1855,1225.32) 1859.68,1225.32 2000,1085 v1(2000,835)
Manual_Throttle_Pin: R5.1 S1.11 U1.1 | length 481.1
  Top Layer w20: S1.11 1865.75,1329.25 1886,1309 1886,1181 1834.65,1129.65 1834.65,1008.45
  Top Layer w31.5: R5.1 S1.11
MISO: ISP.1 U1.16 | length 509.1
  Top Layer w20: v1(2045,865) 2045,815 2110.24,749.76 U1.16
  Bottom Layer w20: v1(2045,865) 2080,900 2205.32,900 ISP.1
MOSI: ISP.4 U1.15 | length 416
  Top Layer w20: U1.15 2078.74,681.26 2120.21,639.79 2374.47,639.79 ISP.4
MUX_CONTROL_AILERON: U1.26 U4.1 | length 2525.8
  Top Layer w7: U1.26 2078.74,1105.36 2103.38,1130 v1(2202.56,1130) ; U4.1 3252.53,2415 v1(3275,2415)
  Bottom Layer w7: v1(2202.56,1130) 2297.83,1130 2365.76,1197.94 2365.76,2298.75 2535.02,2468 3222,2468 v1(3275,2415)
MUX_CONTROL_ELEVATOR: U1.25 U3.1 | length 2353
  Top Layer w7: U1.25 2120.67,1050.67 2154.45,1084.45 v1(2190,1084.45) ; U3.1 3151.28,2415 v1(3175,2415)
  Bottom Layer w7: v1(2190,1084.45) 2270.85,1084.45 2301.4,1115 2301.3,1115.09 2378.76,1192.56 2378.76,2293.36 2540.4,2455 3135,2455 v1(3175,2415)
MUX_CONTROL_GEAR: U1.23 U6.1 | length 2109.6
  Top Layer w7: U1.23 2194.06,964.06 2230.7,1000.7 v1(2232.85,998.55) ; U6.1 2948.78,2415 v1@2965,2415
  Bottom Layer w7: v1(2232.85,998.55) 2406.76,1172.47 2406.76,2281.76 2552,2427 2933,2427 2945,2415 v1(2975,2415)
MUX_CONTROL_RUDDER: U1.24 U2.1 | length 2201.4
  Top Layer w7: U1.24 2224.8,1055 2229.13,1050.67 v1(2230,1050.67) ; U2.1 3050.03,2415 v1(3070,2415)
  Bottom Layer w7: v1(2230,1050.67) 2255.45,1050.67 2391.76,1186.98 2391.76,2285.15 2546.62,2440 3045,2440 v1(3070,2415)
MUX_CONTROL_THROTTLE: U1.27 U5.1 | length 2661.8
  Top Layer w7: U1.27 2047.24,1092.24 2115,1160 v1(2150,1160) ; U5.1 3353.78,2415 v1(3375,2415)
  Bottom Layer w7: v1(2150,1160) 2309.44,1160 2351.21,1201.77 2351.21,2304.78 2528.99,2482.56 3307.44,2482.56 v1(3375,2415)
NetC2_1: C2.1 U7.1
  other v1: 1432.41,2482.56
NetC3_1: C3.1 U7.2
  other v1: 1388.07,2432.56
NetD1_2: D1.2 R1.2 | length 49.9
  Top Layer w31: D1.2 R1.2
NetD2_2: D2.2 R2.2 | length 54.9
  Top Layer w31.5: D2.2 R2.2
NetD3_2: D3.2 R5.2 | length 54.9
  Top Layer w31.5: D3.2 R5.2
NetD5_2: D5.2 R10.2 | length 51
  Top Layer w21: D5.2 2047.24,525.63 R10.2@2050,522.87
NetD6_2: D6.2 R11.2 | length 54.9
  Top Layer w31.5: D6.2 R11.2
NetD7_2: D7.2 R17.2 | length 54.9
  Top Layer w31.5: D7.2 R17.2
NetD8_2: D8.2 R3.2 | length 54.9
  Top Layer w31.5: D8.2 R3.2
NetD9_2: D9.2 R4.2 | length 82.4
  Top Layer w31.5: R4.2 D9.2
NetD10_2: D10.2 R15.2 | length 82.4
  Top Layer w31.5: R15.2 D10.2
NetD11_2: D11.2 R16.2 | length 82.4
  Top Layer w31.5: R16.2 D11.2
NetR12_1: R12.1 R13.2 | length 52.3
  Top Layer w31: R13.2 R12.1
OUT_AILERON_SIGNAL: OUTPUT.2 U4.3 | length 144.2
  Top Layer w7: U4.3 3209.97,2478.72 3220,2488.75 OUTPUT.2
OUT_ELEVATOR_SIGNAL: OUTPUT.3 U3.3 | length 144.7
  Top Layer w7: U3.3 3108.72,2477.47 3120,2488.75 OUTPUT.3
OUT_GEAR_SIGNAL: OUTPUT.5 U6.3 | length 145.7
  Top Layer w7: U6.3 2906.22,2476.22 2920,2490 OUTPUT.5
OUT_RUDDER_SIGNAL: OUTPUT.4 U2.3 | length 145.2
  Top Layer w7: U2.3 3007.47,2476.22 3020,2488.75 OUTPUT.4
OUT_THROTTLE_SIGNAL: OUTPUT.1 U5.3 | length 143.6
  Top Layer w7: U5.3 3311.22,2476.22 3320,2485 OUTPUT.1
RC_AILERON_SIGNAL: RC.2 U4.4 | length 786.2
  Top Layer w7: v1(3175,2340) 3175,2340.23 U4.4
  Bottom Layer w7: RC.2 2665,2090 2935,2090 2955,2110 2955,2175 2975,2195 3030,2195 v1(3175,2340)
RC_ELEVATOR_SIGNAL: RC.3 U3.4 | length 550.6
  Top Layer w7: v1(3070,2340) 3073.52,2340 U3.4
  Bottom Layer w7: RC.3 2745,2110 2835,2110 2855,2130 2855,2165 3030,2340 v1(3070,2340)
RC_Gear_Signal: RC.5 U1.12 | length 3230.6
  Top Layer w7: U1.12 1984.25,436.21 2027.73,392.73 2462.27,392.73 2526.5,456.95 2526.5,1843.05 2457.27,1912.27 2457.27,2247.27 2500,2290 2795,2290 2905,2180 RC.5
RC_RUDDER_SIGNAL: RC.4 U2.4 | length 310.4
  Top Layer w7: v1(2975,2345) 2977.27,2345 U2.4
  Bottom Layer w7: RC.4 2975,2320 v1(2975,2345)
RC_THROTTLE_SIGNAL: RC.1 U5.4 | length 1119.2
  Top Layer w7: v1(3275,2340) 3276.02,2340 U5.4
  Bottom Layer w7: RC.1 2555,2100 2555,2035 2585,2005 3045,2005 3155,2115 3155,2199.93 3275,2319.93 v1(3275,2340)
RELAY_CTRL: K1.1 U1.28 | length 1638.5
  Top Layer w20: v1(1988.46,1275) 2015.75,1247.72 U1.28
  Bottom Layer w20: K1.1 885,1235 1778.18,1235 1818.18,1275 v1(1988.46,1275)
RESET: ISP.5 U1.29 | length 657.1
  Top Layer w20: U1.29 1984.25,995.75 2000,980 2070,980 2095,955 v1(2095,825)
  Bottom Layer w20: v1(2095,825) 2095,790.32 2300,585.32 ISP.5
SCK: ISP.3 U1.17 | length 191.8
  Top Layer w20: U1.17 2255.12,685.32 ISP.3
SW_FB: R8.1 R9.2 U7.4 | length 581.1
  Top Layer w31: U7.4 1388.07,2251.93 1455,2185 1760.57,2185 R8.1 R9.2
SW_REG_EN: R6.1 R7.2 U7.5 | length 133.6
  Top Layer w35: U7.5 1577.05,2286.93 R6.1 R7.2
uC_Gear_Signal: U1.13 U6.4 | length 3126.3
  Top Layer w7: U1.13 2015.75,449.25 2050,415 2440,415 2495,470 2495,1830 2435,1890 2435,2269.54 2486.95,2321.5 2795,2321.5 2848.7,2375.2 U6.4
uC_Status_LED: D5.1 U1.14 | length 93.2
  Top Layer w21: U1.14 2047.24,630.63 D5.1@2050,627.87
XTAL_N: C7.2 U1.7 Y1.1 | length 351.6
  Top Layer w15: Y1.1@1645,987.32 1645,843.33 1685,803.33 1791.42,803.33 1794.67,806.58 U1.7
  other v1: 1655.83,1055
XTAL_P: C8.2 U1.8 Y1.2 | length 332.6
  Top Layer w15: Y1.2@1645,613.31 1645,738.33 1685,778.33 1791.42,778.33 1794.67,775.08 U1.8
  other v1: 1645,540
pads on no net: AUTO.6 AUTO.12 AUTO.18 K1.6 OUTPUT.6 OUTPUT.12 OUTPUT.18 RC.6 RC.12 RC.18 S1.5 S1.8

## Polygon pours and split planes (outlines as drawn)
5V on Top Layer "Top_Layer_5V" (solid, remove dead copper, pour order 18): 2005,1940 1495,1940 1495,5 2005,5
5V on Top Layer "Top_Layer_5V" (solid, remove dead copper, pour order 16): 2005,2790 3800,2790 3800,1860 2530,1860 2530,10 2005,10
5V5 on Top Layer "Top_Layer_BAT+" (solid, remove dead copper, pour order 14): 1740,2790 1740,2090 1997.56,2090 1997.56,2790
BAT+ on Top Layer "Top_Layer_BAT+" (solid, remove dead copper, pour order 8): 1400,2060 1685,2060 1685,2470 1668.1,2453.1 1395,2453.1
BAT+ on Top Layer "Bottom Layer-PBIAS" (solid, remove dead copper, pour order 2): 295,2700.35 295,1645 830,1645 1030,1445 1415,1445 1415,2705
5V5 on Top Layer "Top_Layer_BAT+" (solid, remove dead copper, pour order 12): 1775,2775
LX on Top Layer "Top_Layer_LX" (solid, remove dead copper, pour order 6): 1720,2450 1470,2450 1470,2790 1720,2790
BAT+_OUT on Top Layer "Bottom Layer-PBIAS" (solid, remove dead copper, pour order 4): 1415,165 300,165 300,1735 1415,1735
GND on Bottom Layer "Bottom_Layer_PWR_GND" (solid, remove dead copper, pour order 22): 1739.6,1265 1445,1265 1445,0 1740,0
GND on Bottom Layer "Bottom_Layer_GND" (solid, remove dead copper, pour order 10): 1735,2795 1735,5 2545,5 2560,20 2560,2795
GND on Bottom Layer "Bottom Layer-PBIAS" (solid, remove dead copper, pour order 0): 295,2800 1410,2800 1410,0 295,0
GND on Bottom Layer "Bottom_Layer_GND" (solid, remove dead copper, pour order 24): 2560,2795 2560,1845 3815,1845 3815,2795
GND on Bottom Layer "Bottom_Layer_PWR_GND" (solid, remove dead copper, pour order 20): 1410,1285 1705,1285 1705,2805 1410,2805

## Keep-outs
Keep-Out Layer:
  rectangle: 1735,765 1868.86,810
  rectangle: 1570,500 1745,1101.28

## Silkscreen, mask and mechanical layers (free items; w line width, h text height)
Top Overlay:
  lines w10: 2480,1635 2500,1615 ; 2500,1680 2500,1615 ; 2520,1635 2500,1615
  lines w20: 295,0 295,2805 3815,2805 3815,1845 2545,1845 2545,0 295,0
  text "S / 5V / GND" at 2755,2750 h100 r180
  text "BATTERY" at 590,2715 h100
  text "R" at 2995,2440 h100
  text "E" at 3095,2440 h100
  text "A" at 3190,2440 h100
  text "T" at 3295,2440 h100
  text "G" at 2885,2432.56 h100
  text "A" at 2575,2200 h100
  text "E" at 2685,2200 h100
  text "R" at 2780,2200 h100
  text "T" at 2480,2195 h100
  text "G" at 2875,2195 h100
  text "T" at 3205,2190 h100
  text "A" at 3300,2190 h100
  text "E" at 3405,2190 h100
  text "R" at 3505,2190 h100
  text "G" at 3600,2190 h100
  text "S / 5V / GND" at 2260,1930 h100
  text "CAL" at 2265,1715 h100
  text "MAN" at 2265,1610 h100
  text "N/C" at 1595,1605 h100
  text "AILER" at 2265,1515 h100
  text "ELEV" at 2265,1400 h100
  text "THRO" at 2265,1295 h100
  text "RUDD" at 2265,1190 h100
  text "MODE" at 1615,380 h100
  text "AUTO" at 1920,275 h100
  text "MANUAL" at 1930,180 h100
  text "E-STOP" at 1930,85 h100
  text "QUADCOPTER" at 445,45 h100
Bottom Overlay:
  text "John Sabino / 10/25/2018" at 1105,2070 h100 r270
  text "V1.0.0" at 385,1720 h100 r270
  text "Quad-Copter Signal Multiplexer and Emergency Stop System" at 475,1655 h100 r270

## Text inside footprints (layer, text, board x,y; h text height)
ISP: Top Overlay "1" at 2300,865.32 h50 r270; Top Overlay "2" at 2400,885.32 h50 r270; Top Overlay "5" at 2300,525.32 h50 r270; Top Overlay "6" at 2400,525.32 h50 r270
P1: Top Overlay "-" at 565,2570 h200; Top Overlay "+" at 840,2575 h200
P2: Top Overlay "-" at 530,505 h200; Top Overlay "+" at 805,510 h200